# Altium PCB Potencia.PcbDoc
Units mm, origin at the board's own origin, x right, y up, seen from the top; angles counter-clockwise.
Board outline 100 x 100 mm, 2 copper layers (Top Layer, Bottom Layer); 128 components, 68 nets, 367 pads, 168 vias.
Unrouted connection lines stored in the file: 5.
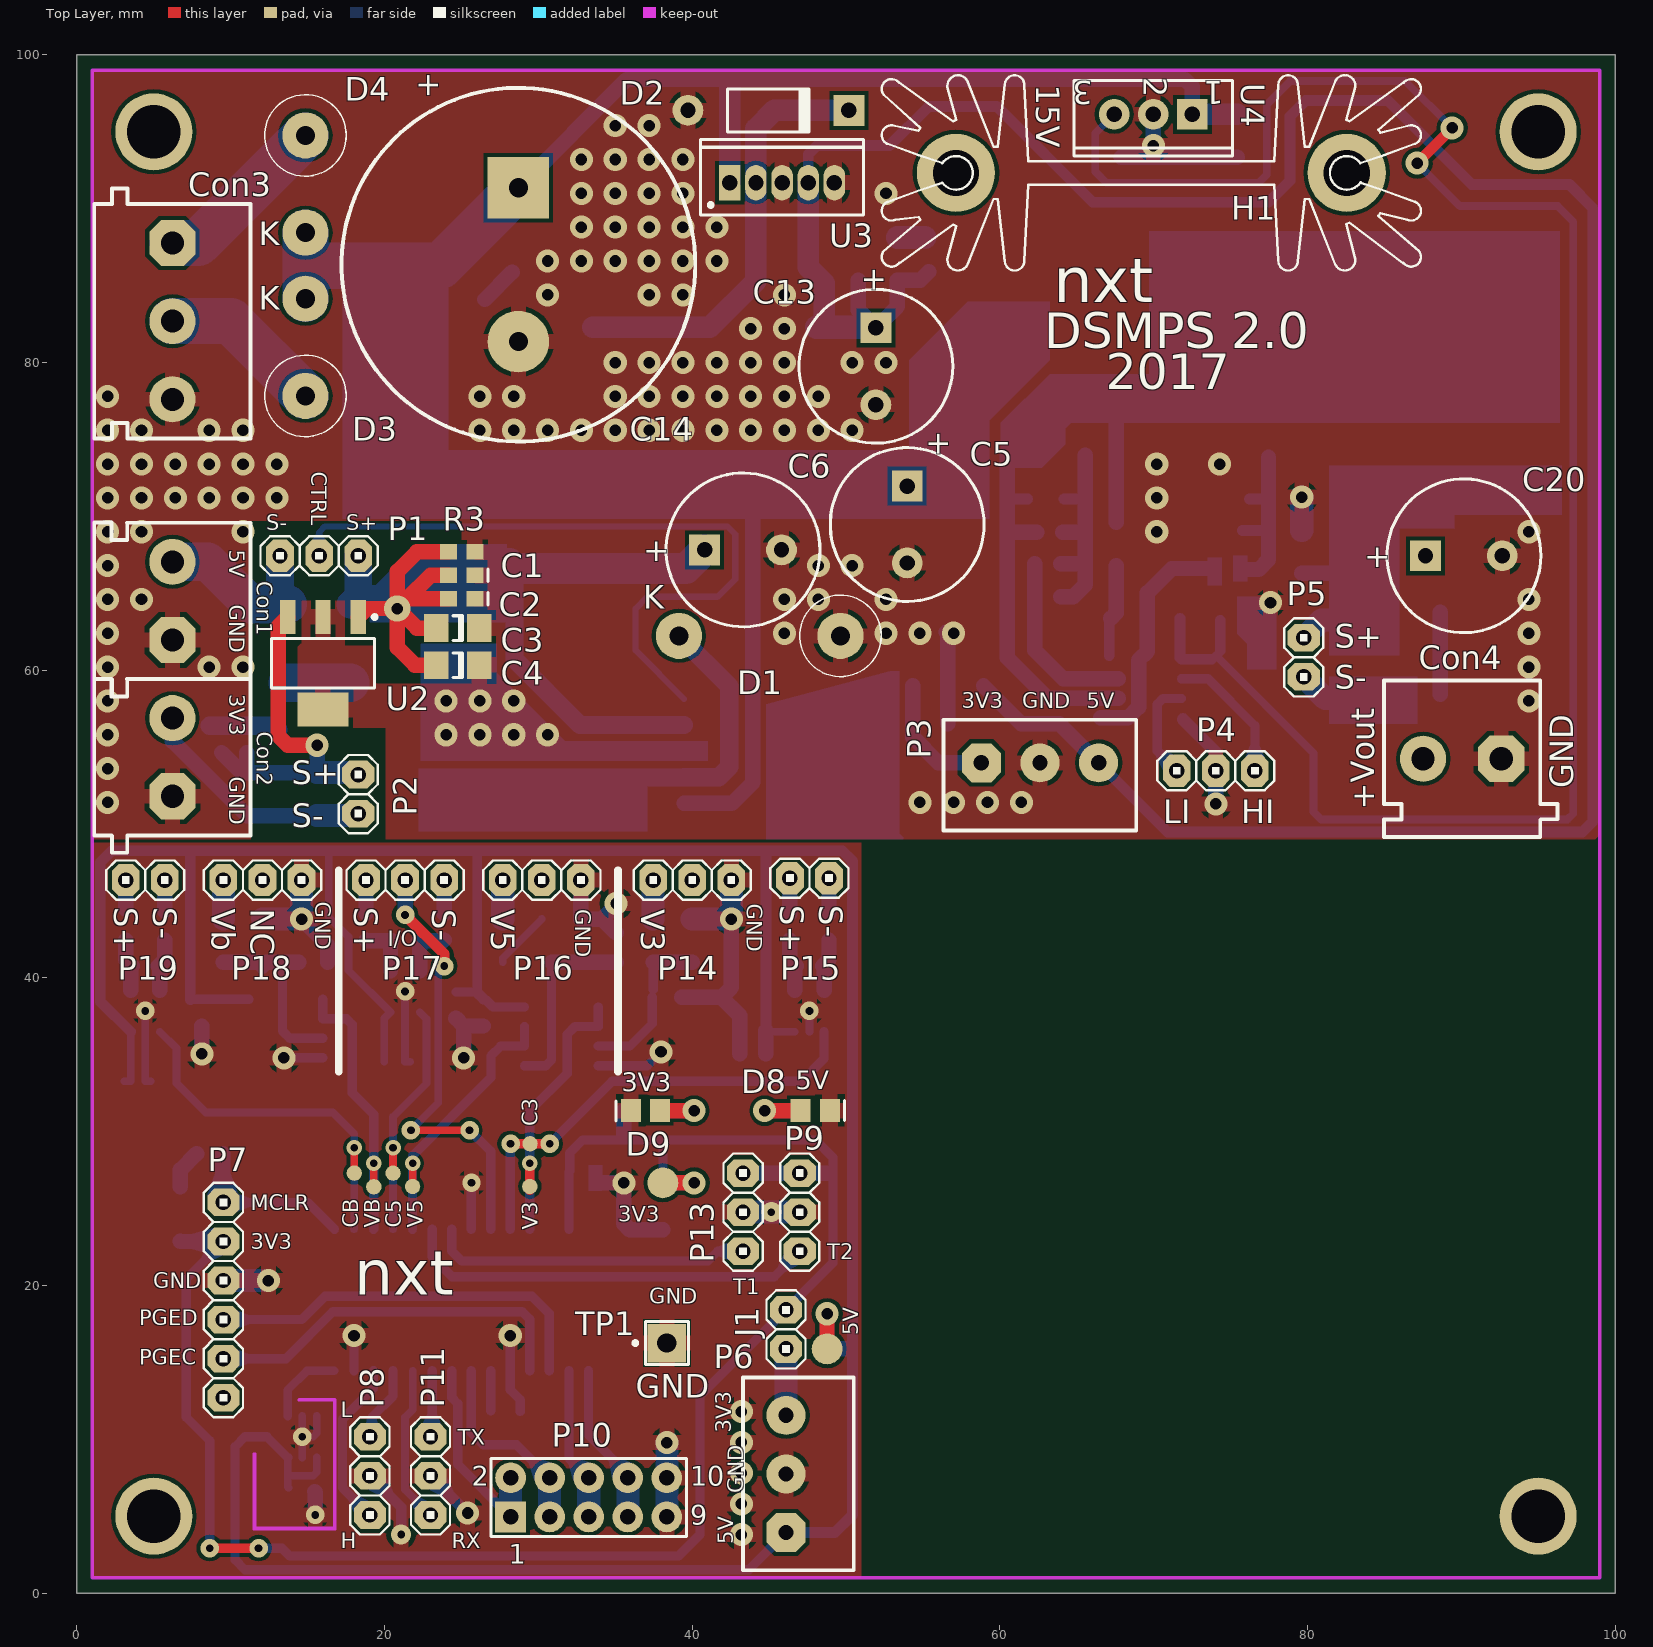
[diagram p0: Top Layer view]
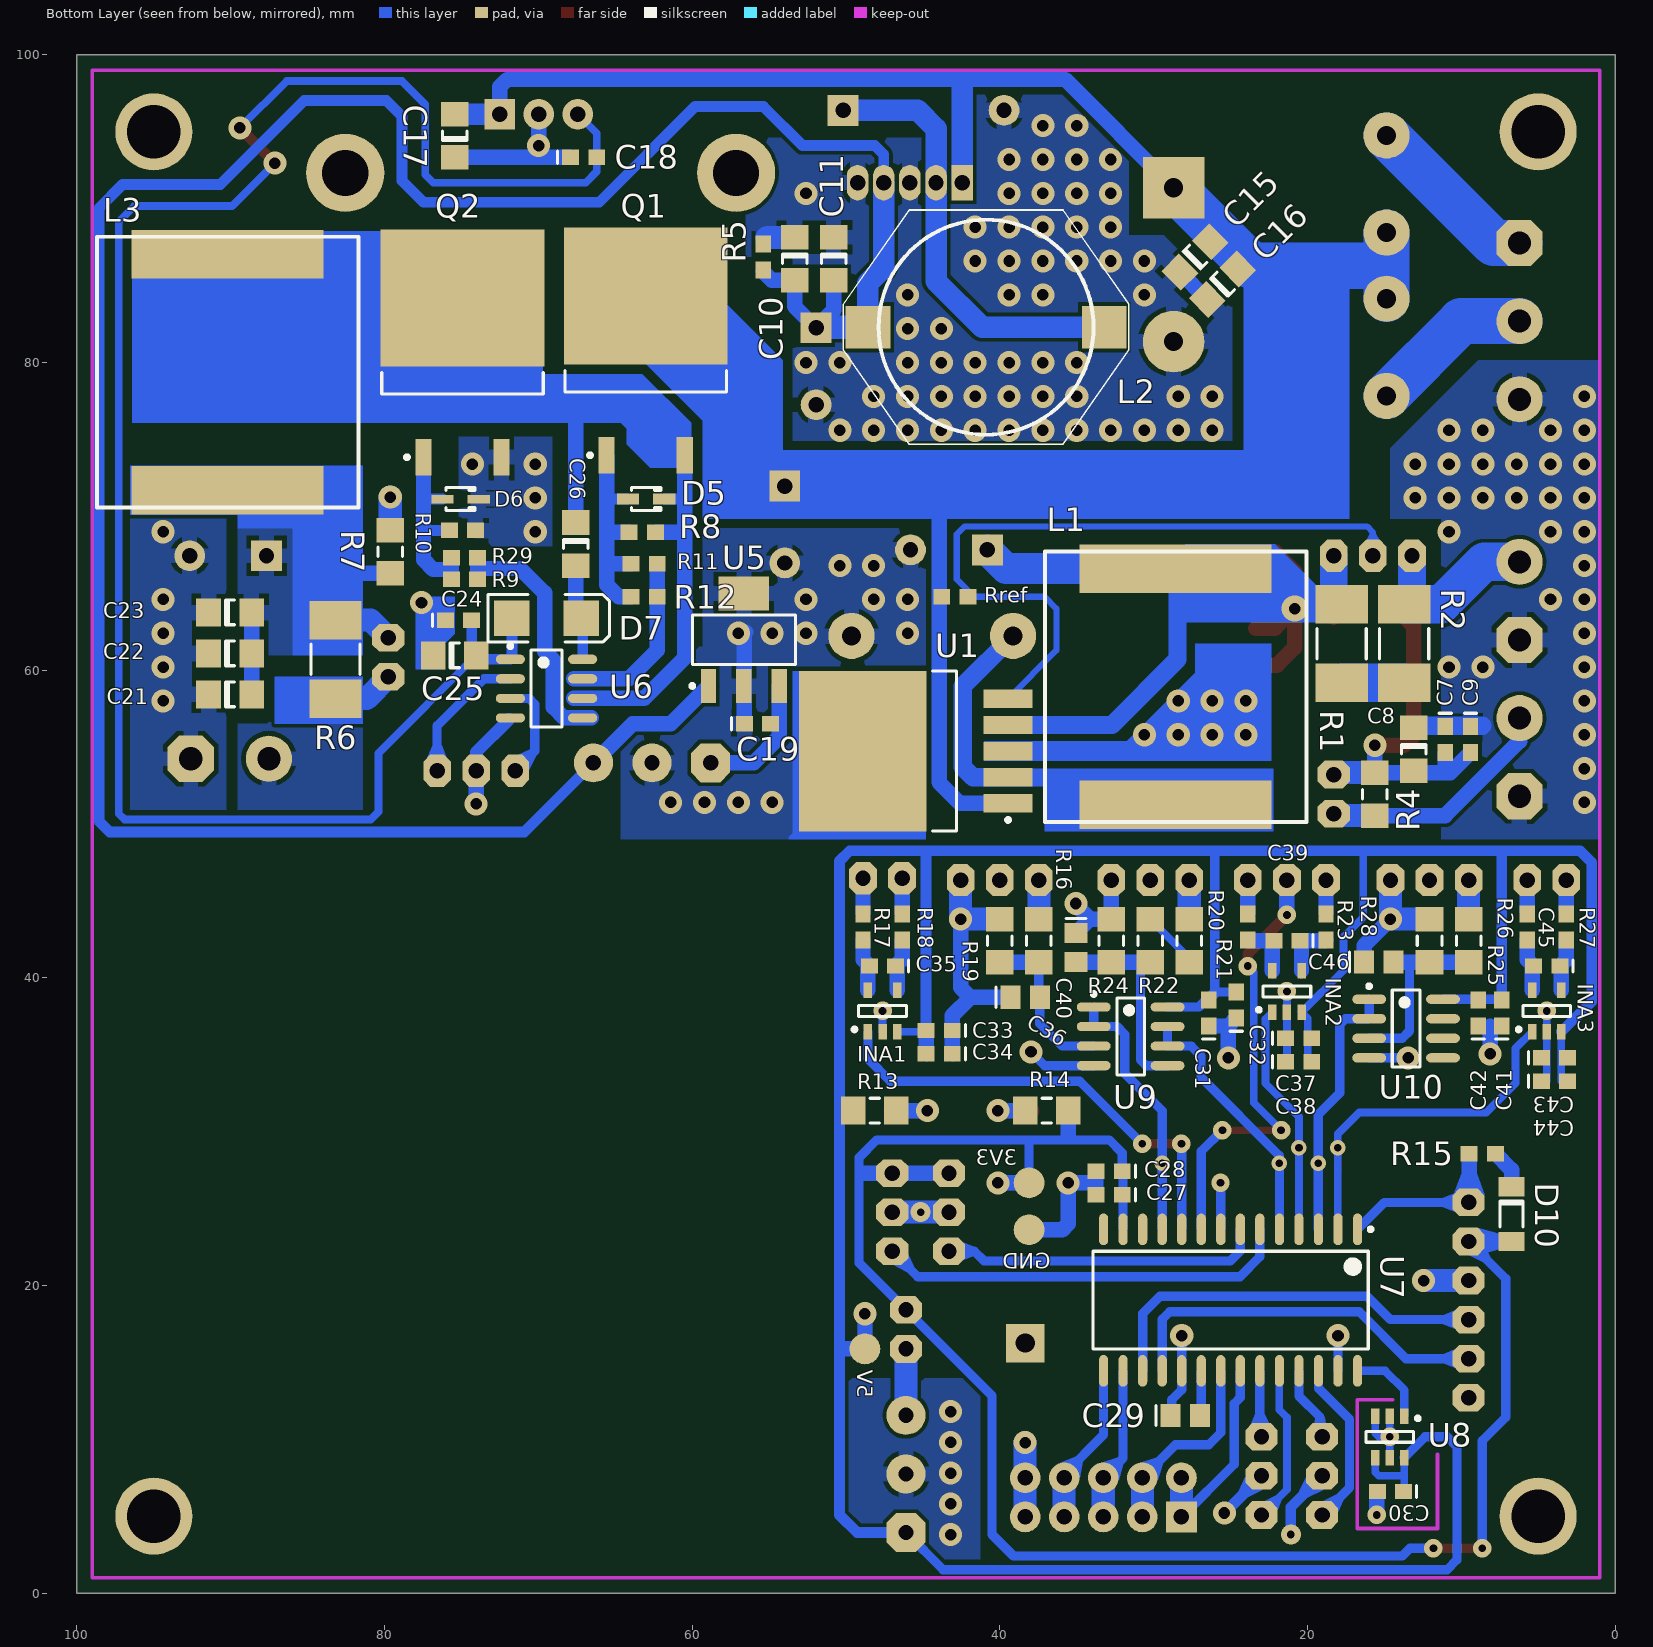
[diagram p1: Bottom Layer view, seen from below]

## Layer stack, top to bottom
Top Solder: solder mask 0.0102, Solder Resist, Dk 3.5
Top Layer: signal copper 0.0356
Dielectric 1: dielectric 0.32, FR-4, Dk 4.8
Bottom Layer: signal copper 0.0356
Bottom Solder: solder mask 0.0102, Solder Resist, Dk 3.5

## Board outline
0,0 100,0 100,100 0,100

## Design rules (kind name [scope] priority, off if disabled: settings)
Clearance "Polygon Clearance" [InPolygon AND (Not(OnLayer('Keep-Out Layer'))) vs All AND (Not(OnLayer('Keep-Out Layer')))] p1: gap=0.25
Clearance [All AND (Not(OnLayer('Keep-Out Layer'))) vs All AND (Not(OnLayer('Keep-Out Layer')))] p2: gap=0.2
ComponentClearance [All] p1 off: gap=0.5 collisioncheckmode=3 verticalgap=0.254 showdistances=TRUE
Height [All] p1: minheight=0 maxheight=80 prefheight=12.7
MinimumSolderMaskSliver SilkscreenOverComponentPads [All] p2: minsoldermaskwidth=0.254
PlaneConnect [All] p1: planeconnectstyle=Relief reliefexpansion=0.508 reliefentries=4 reliefconductorwidth=0.7 reliefairgap=0.6
PolygonConnect [All] p1: connectstyle=Relief reliefconductorwidth=1 reliefentries=4 polygonreliefangle="90 Angle" airgapwidth=0.3
RoomDefinition "Remote Feedback" [InComponentClass('Remote Feedback')] p1 off: confinementstyle=ConfineIn formatcopy=TRUE lockcomponents=FALSE outline 1,30.861 51,30.861 51,48.768 1,48.768
RoomDefinition Control [InComponentClass('Control')] p2 off: confinementstyle=ConfineIn formatcopy=TRUE lockcomponents=FALSE outline 1,1.524 51,1.524 51,30.861 1,30.861
RoomDefinition "Variable Output 1" [InComponentClass('Variable Output 1')] p3: confinementstyle=ConfineIn formatcopy=TRUE lockcomponents=FALSE outline 56.388,49.022 99.441,49.022 99.441,89.408 56.388,89.408
RoomDefinition Regulators [InComponentClass('Regulators')] p4 off: confinementstyle=ConfineIn formatcopy=TRUE lockcomponents=FALSE outline 1,74.549 99,74.549 99,99.06 1,99.06
RoomDefinition "5V and 3V3 Outputs" [InComponentClass('5V and 3V3 Outputs')] p5 off: confinementstyle=ConfineIn formatcopy=TRUE lockcomponents=FALSE outline 1,49 55.372,49 55.372,74.676 1,74.676
RoutingVias [All] p1: holewidth=0.5 width=1.5 viastyle="Through Hole" minholewidth=0.3 minwidth=1 maxholewidth=1.25 maxwidth=3
SolderMaskExpansion [All] p1: expansion=0.102
Width [All] p1: maxlimit=8 minlimit=0.16 preferedwidth=1
27 further rules are at their usual default settings.

## Classes and differential pairs
component class "Remote Feedback": C31 C32 C33 C34 C35 C36 C37 C38 C39 C40 C41 C42 C43 C44 C45 C46 INA1 INA2 INA3 P14 P15 P16 P17 P18 P19 R16 R17 R18 R19 R20 R21 R22 R23 R24 R25 R26 R27 R28 U9 U10
component class Control: C27 C28 C29 C30 D8 D9 D10 J1 P6 P7 P8 P9 P10 P11 P13 R13 R14 R15 TP1 U7 U8
component class "5V and 3V3 Outputs": C1 C2 C3 C4 C5 C6 C7 C8 C9 Con1 Con2 D1 L1 P1 P2 R1 R2 R3 R4 Rref U1 U2
component class Regulators: C10 C11 C13 C14 C15 C16 C17 C18 C19 Con3 D2 D3 D4 H1 L2 P3 R5 U3 U4 U5
component class "Variable Output 1": C20 C21 C22 C23 C24 C25 C26 Con4 D5 D6 D7 L3 P4 P5 Q1 Q2 R6 R7 R8 R9 R10 R11 R12 R29 U6

## Components (designator, comment, footprint, x,y, rotation, side; value= is the part's Value field where it differs from the comment)
C1 "C0603" 0603 25.019,66.167 r180 top
C2 "C0603" 0603 25.019,64.643 r180 top
C3 "SMD" 1206 24.765,62.738 r180 top
C4 "SMD" 1206 24.765,60.325 r180 top
C5 "220uF" CAPPR5-10X16 53.975,69.469 r270 top
C6 "470uF HF" CAPPR5-10X20 43.307,67.818 r0 top
C7 "C0603" 0603 11.049,55.499 r270 bottom
C8 "SMD" 1206 13.081,54.864 r270 bottom
C9 "C0603" 0603 9.398,55.499 r270 bottom
C10 "SMD" 1206 53.34,86.741 r270 bottom
C11 "SMD" 1206 50.8,86.741 r270 bottom
C13 "470uF HF" CAPPR5-10X20 51.943,79.756 r270 top
C14 "Generic Electrolytic Capacitor" "Capacitor 23x48 (DxH)" 28.702,86.36 r90 top
C15 "SMD" 1206 27.305,86.868 r135 bottom
C16 "SMD" 1206 25.527,85.09 r135 bottom
C17 "SMD" 1206 75.438,94.742 r90 bottom
C18 "C0603" 0603 67.056,93.345 r180 bottom
C19 "C0603" 0603 55.753,56.515 r180 bottom
C20 "50V" CAPPR5-10X20 90.17,67.437 r0 top
C21 "SMD" 1206 90.043,58.42 r180 bottom
C22 "SMD" 1206 90.043,61.087 r180 bottom
C23 "SMD" 1206 90.043,63.754 r180 bottom
C24 "C0603" 0603 75.184,63.246 r180 bottom
C25 "SMD" 1206 75.438,60.96 r180 bottom
C26 "SMD" 1206 67.564,68.199 r270 bottom
C27 "C0603" 0603 32.893,25.908 r0 bottom
C28 "C0603" 0603 32.893,27.432 r0 bottom
C29 "6.3V" C0805 27.94,11.557 r180 bottom
C30 "C0603" 0603 14.605,6.604 r0 bottom
C31 "C0603" 0603 26.416,37.719 r90 bottom
C32 "C0603" 0603 24.638,38.227 r90 bottom
C33 "C0603" 0603 43.942,36.576 r0 bottom
C34 "C0603" 0603 43.942,35.052 r0 bottom
C35 "C0603" 0603 47.625,40.767 r0 bottom
C36 "CDR01" C0805 38.354,38.735 r180 bottom
C37 "C0603" 0603 20.574,36.068 r180 bottom
C38 "C0603" 0603 20.574,34.544 r180 bottom
C39 "C0603" 0603 21.336,42.418 r0 bottom
C40 "CDR01" C0805 35.052,41.968 r270 bottom
C41 "C0603" 0603 7.366,37.719 r90 bottom
C42 "C0603" 0603 8.89,37.719 r90 bottom
C43 "C0603" 0603 3.937,34.798 r180 bottom
C44 "C0603" 0603 3.937,33.274 r180 bottom
C45 "C0603" 0603 4.445,40.767 r0 bottom
C46 "CDR01" C0805 15.367,41.021 r180 bottom
Con1 "Salida Buck" My_CN2 1.118,59.436 r90 top
Con2 "Salida Buck" My_CN2 1.118,49.276 r90 top
Con3 "AC Input" My_CN3 11.303,90.297 r270 top
Con4 "Salida Buck" My_CN2 95.123,49.149 r180 top
D1 "1N5822" "Vertical DO-201AD 10.5mm" 46.99,62.23 r180 top
D2 "1N5817" DO-41 44.958,96.393 r0 top
D3 "1N5408" "Vertical DO-201AD" 14.859,80.645 r90 top
D4 "1N5408" "Vertical DO-201AD" 14.859,91.948 r270 top
D5 "15V Zener" SOD323#1 62.992,71.12 r180 bottom
D6 "15V Zener" SOD323#2 75.057,71.12 r180 bottom
D7 "MBRS1100T3G" SMB 69.469,63.373 r180 bottom
D8 "15-21SURC/S530-A3/TR8" 15-21SURC/S530-A3/TR8 48.006,31.369 r0 top
D9 "15-21SURC/S530-A3/TR8" 15-21SURC/S530-A3/TR8 36.957,31.369 r180 top
D10 "1N4148" SOD80C 6.731,24.638 r90 bottom
H1 "Heat sink TO22" My_Heat_sink_TO22 69.85,93.091 r0 top
INA1 "INA196" SOT-23-5 47.625,37.846 r90 bottom
INA2 "INA196" SOT-23-5 21.336,39.116 r90 bottom
INA3 "INA196" SOT-23-5 4.445,37.846 r90 bottom
J1 "Header 2" My_1X02 46.101,18.415 r90 top
L1 "Ferrite Inductor" "SRP1770TA Series" 28.575,58.928 r90 bottom
L2 "SMTDR1206" "SMTDR1206 Inductor" 40.894,82.296 r0 bottom
L3 "Ferrite Inductor" "SRP1770TA Series" 90.202,79.375 r270 bottom
P1 "Header 3" My_1X03 15.748,67.437 r0 top
P2 "Header 2" My_1X02 18.288,53.213 r90 top
P3 "XY2500R-F 3P" OSTOQ033250 62.611,53.975 r0 top
P4 "Header 3" My_1X03 74.041,53.467 r180 top
P5 "Header 2" My_1X02 79.756,62.103 r90 top
P6 "XY2500R-F 3P" OSTOQ033250 46.101,7.747 r90 top
P7 "ICSP" My_1X06 9.525,19.05 r270 top
P8 "Header 3" My_1X03 19.05,7.62 r90 top
P9 "Header 3" My_1X03 46.99,24.765 r270 top
P10 "Interface" HDR2X5 28.194,4.953 r0 top
P11 "Header 3" My_1X03 22.987,7.62 r270 top
P13 "Header 3" My_1X03 43.307,24.765 r270 top
P14 "Header 3" My_1X03 40.005,46.355 r180 top
P15 "Header 2" My_1X02 46.355,46.482 r180 top
P16 "Header 3" My_1X03 30.226,46.355 r180 top
P17 "Header 3" My_1X03 21.336,46.355 r180 top
P18 "Header 3" My_1X03 12.065,46.355 r180 top
P19 "Header 2" My_1X02 3.175,46.355 r180 top
Q1 "SUM110P06" D2PAK_N 63.024,80.772 r90 bottom
Q2 "SUM110P06" D2PAK_N 74.93,80.645 r90 bottom
R1 "ERJL1W" L1W-2512 17.78,61.722 r270 bottom
R2 "ERJL1W" L1W-2512 13.716,61.722 r90 bottom
R3 "2K2" ERA-0603 25.019,67.691 r180 top
R4 "SMD" 8RB-1206 15.621,51.943 r270 bottom
R5 "1K" ERA-0603 55.372,86.868 r270 bottom
R6 "ERJL1W" L1W-2512 83.185,60.706 r270 bottom
R7 "SMD" 8RB-1206 79.629,67.691 r270 bottom
R8 "10K" ERA-0603 63.246,68.961 r180 bottom
R9 "10R" ERA-0603 74.803,65.913 r0 bottom
R10 "10K" ERA-0603 74.93,69.088 r0 bottom
R11 "10" ERA-0603 63.119,66.929 r0 bottom
R12 "10" ERA-0603 63.119,64.77 r0 bottom
R13 "SMD" 8RB-1206 48.133,31.369 r180 bottom
R14 "SMD" 8RB-1206 36.957,31.369 r0 bottom
R15 "10K" ERA-0603 8.636,28.575 r180 bottom
R16 "SMD" 8RB-1206 37.465,42.418 r90 bottom
R17 "10R" ERA-0603 48.895,43.307 r90 bottom
R18 "10R" ERA-0603 46.355,43.307 r90 bottom
R19 "SMD" 8RB-1206 40.005,42.418 r270 bottom
R20 "SMD" 8RB-1206 27.686,42.418 r90 bottom
R21 "10R" ERA-0603 23.876,43.307 r90 bottom
R22 "SMD" 8RB-1206 30.226,42.418 r90 bottom
R23 "10R" ERA-0603 18.796,43.307 r90 bottom
R24 "SMD" 8RB-1206 32.766,42.418 r270 bottom
R25 "SMD" 8RB-1206 9.525,42.418 r90 bottom
R26 "10R" ERA-0603 5.715,43.307 r90 bottom
R27 "10R" ERA-0603 3.175,43.307 r90 bottom
R28 "SMD" 8RB-1206 12.065,42.418 r270 bottom
R29 "10R" ERA-0603 74.803,67.31 r0 bottom
Rref "10K" ERA-0603 42.926,64.77 r0 bottom
TP1 "" PIN1 38.354,16.256 r90 top
U1 "LM2576S-5.0" TS5B_N 45.466,54.737 r0 bottom
U2 "TC1262-3.3VDB" SOT-223-DB3_N 16.002,60.452 r270 top
U3 "LM2575T-5.0" T05A 45.847,91.694 r0 top
U4 "MC7815ACT" 221A-04 69.977,96.139 r180 top
U5 "TC1262-3.3VDB" SOT-223-DB3_N 56.642,61.976 r90 bottom
U6 "IRS21867S" SOIC8 69.469,58.801 r180 bottom
U7 "DSPIC33EP64GS502" MCHP-SOIC-SO28_N 25,19.05 r270 bottom
U8 "MCP1501T" SOT-23-6 14.652,10.16 r270 bottom
U9 "MCP6002-I/SN" SOIC-SN8_N 31.496,36.195 r180 bottom
U10 "MCP6002-I/SN" SOIC-SN8_N 13.589,36.703 r180 bottom

## Footprints (in the part's own frame and the unit in brackets; to place one, negate y for a bottom-side part, rotate by r counter-clockwise, add the part's x,y. Pads: shape width x height; smd on the part's side, far side on the other; paste and mask are expansions set on the pad)
8RB-1206 [mm] "Chip Resistor; Body 3.2 x 1.6 mm (LxW typ)"
  rect 1.6x1.8 smd: 1(-1.4,0) 2(1.4,0)
  silkscreen extent -0.3,-0.8 0.3,0.8
15-21SURC/S530-A3/TR8 [mm] "15-21SURC/S530-A3/TR8 led smd 0805"
  rect 1.3x1.5 smd: 1(-0.95,0) 2(0.95,0)
  silkscreen extent 1.91,-0.64 1.91,0.67
221A-04 [mm] "TO, Thru-Hole, Vertical, Heatsink Mounted; 3 In-Line Leads; Pitch 2.54 mm"
  rect 2x2 hole 1: 1(-2.54,0)
  round 2 hole 1: 2(0,0) 3(2.54,0)
  silkscreen extent -5.15,-2.2 5.15,2.7
0603 [mm] "Chip Capacitor; Body 1.6 x 0.8 mm (LxW typ)"
  rect 1.1x1 smd: 1(-0.85,0) 2(0.85,0)
  silkscreen extent -1.7,-0.4 -1.7,0.4
1206 [mm] "Chip Capacitor; Body 3.2 x 1.6 mm (LxW typ)"
  rect 1.6x1.8 smd: 1(-1.4,0) 2(1.4,0)
  silkscreen extent -0.3,-0.8 0.3,0.8
C0805 [mm] "Chip Capacitor; Body 2.0 x 1.2 mm (LxW typ)"
  rect 1.3x1.5 smd: 1(-0.95,0) 2(0.95,0)
  silkscreen extent -1.9,-0.65 -1.9,0.65
"Capacitor 23x48 (DxH)" [mm] "Electrolytic Capacitor 23x48 (DxH)"
  rect 4x4 hole 1.25: 1(5,0)
  round 4 hole 1.25: 2(-5,0)
  silkscreen extent -11.5,-11.5 11.5,11.5
CAPPR5-10X16 [mm] "Capacitor, Electrolytic, Radial; Body 10 x 16 mm (Dia.xH typ); Pin Spacing 5 mm (typ)"
  rect 2x2 hole 1: 1(-2.5,0)
  round 2 hole 1: 2(2.5,0)
  silkscreen extent -5,-5 5,5
CAPPR5-10X20 [mm] "Capacitor, Electrolytic, Radial; Body 10 x 20 mm (Dia.xH typ); Pin Spacing 5 mm (typ)"
  rect 2x2 hole 1: 1(-2.5,0)
  round 2 hole 1: 2(2.5,0)
  silkscreen extent -5,-5 5,5
D2PAK_N [mm] "D2-PAK, 4-Leads, Body 8.8x10.4mm, Pitch 2.54mm, Lead Span 15.1mm, IPC Medium Density"
  rect 2.4x1.05 smd: 1(-6.8,2.54) 3(-6.8,-2.54)
  rect 8.9x10.65 smd: 2(3.55,0)
  silkscreen extent -6.92,-5.25 -1.3,5.25, body extent -2.7,-5.28 6.3,5.28, height 4.69
DO-41 [mm] "Diode, Axial; Body 5.2 x 2.7 mm (LxDia. max), Lead Dia. 0.86 mm (max)"
  round 2 hole 1: 1(-5.23,0)
  rect 2x2 hole 1: 2(5.23,0)
  silkscreen extent -2.65,-1.4 2.75,1.4
ERA-0603 [mm] "Chip Resistor; Body 1.6 x 0.8 mm (LxW typ)"
  rect 1.1x1 smd: 1(-0.85,0) 2(0.85,0)
HDR2X5 [mm] "Connector; Header; 5x2 Position"
  rect 2x2 hole 1: 1(0,0)
  round 2 hole 1: 2(0,2.54) 3(2.54,0) 4(2.54,2.54) 5(5.08,0) 6(5.08,2.54) 7(7.62,0) 8(7.62,2.54) 9(10.16,0) 10(10.16,2.54)
  silkscreen extent -1.27,-1.27 11.43,3.81
L1W-2512 [mm] "Chip Resistor; Body 6.4 x 3.2 mm (LxW typ)"
  rect 2.5x3.4 smd: 1(-2.55,0) 2(2.55,0)
  silkscreen extent -1,-1.6 1,1.6
MCHP-SOIC-SO28_N [mm] "SOIC, 28-Leads, Body 17.9x7.5mm, Pitch 1.27mm, IPC Medium Density"
  oval 2.05x0.6 smd: 1(-4.6,8.255) 2(-4.6,6.985) 3(-4.6,5.715) 4(-4.6,4.445) 5(-4.6,3.175) 6(-4.6,1.905) 7(-4.6,0.635) 8(-4.6,-0.635) 9(-4.6,-1.905) 10(-4.6,-3.175) 11(-4.6,-4.445) 12(-4.6,-5.715) 13(-4.6,-6.985) 14(-4.6,-8.255) 15(4.6,-8.255) 16(4.6,-6.985) 17(4.6,-5.715) 18(4.6,-4.445) 19(4.6,-3.175) 20(4.6,-1.905) 21(4.6,-0.635) 22(4.6,0.635) 23(4.6,1.905) 24(4.6,3.175) 25(4.6,4.445) 26(4.6,5.715) 27(4.6,6.985) 28(4.6,8.255)
  silkscreen extent -4.72,-8.95 3.18,9.23, body extent -3.75,-8.95 3.75,8.95, height 2.65
My_1X02 [mm]
  oct 1.8x2.1 hole 1: 1(-2.54,0) 2(0,0)
  silkscreen extent -3.81,-1.27 1.27,1.27
My_1X03 [mm]
  oct 1.8x2.1 hole 1: 1(-2.54,0) 2(0,0) 3(2.54,0)
  silkscreen extent -3.81,-1.27 3.81,1.27
My_1X06 [mm]
  oct 1.8x2.1 hole 1: 1(-6.35,0) 2(-3.81,0) 3(-1.27,0) 4(1.27,0) 5(3.81,0) 6(6.35,0)
  silkscreen extent -7.62,-1.27 7.62,1.27
My_CN2 [mm]
  oct 3x3 hole 1.5: 1(2.527,-5.093)
  round 3 hole 1.5: 2(7.607,-5.093)
  silkscreen extent -1.14,-10.17 10.16,-0.01
My_CN3 [mm]
  oct 3x3 hole 1.5: 1(2.527,-5.093)
  round 3 hole 1.5: 2(7.607,-5.093) 3(12.687,-5.093)
  silkscreen extent -1.02,-10.17 15.23,-0.01
My_Heat_sink_TO22 [mm]
  round 5.08 hole 3: A2,5(-12.7,-0.762) B2,5(12.7,-0.762)
  silkscreen extent -17.53,-7.11 17.53,5.59
OSTOQ033250 [mm] "TERM BLOCK HDR 3POS VERT 3.81MM"
  oct 2.54x2.54 hole 1: 1(-3.81,0)
  round 2.54 hole 1: 2(0,0) 3(3.81,0)
  silkscreen extent -6.26,-4.4 6.26,2.8
PIN1 [mm] "Connector; Plug"
  rect 2.5x2.5 hole 1.25: 1(0,0)
  silkscreen extent -1.4,-1.4 1.4,2.17
SMB [mm] "DO-214-AA/SMB; 2 C-Bend Leads; Body 5.3 x 3.6 mm, inc. leads (LxW)"
  rect 2.3x2.3 smd: 1(-2.25,0) 2(2.25,0)
  silkscreen extent -3.8,-1.55 4.1,1.55
"SMTDR1206 Inductor" [mm] "SMTDR1206 Inductor"
  rect 2.92x2.79 smd: 1(-7.685,0) 2(7.685,0)
  silkscreen extent -9.27,-7.62 9.27,7.62
SOD80C [mm] "Metal Electrode Face (MELF) Diode; Body 3.5 x 1.6 mm (LxDia)"
  rect 1.25x1.7 smd: 1(-1.775,0) 2(1.775,0)
  silkscreen extent -0.85,-0.75 0.85,0.75
SOD323#1 [mm] "SOD-323/SC-76; 2 Leads; Body 1.7 x 1.3 mm, (LxW)"
  rect 1.45x0.7 smd: 1(1.175,0) 2(-1.175,0)
  silkscreen extent -0.95,-0.75 0.95,0.75
SOD323#2 [mm] "SOD-323/SC-76; 2 Leads; Body 1.7 x 1.3 mm, (LxW)"
  rect 1.45x0.55 smd: 1(1.175,0) 2(-1.175,0)
  silkscreen extent -0.95,-0.75 0.95,0.75
SOIC8 [mm] "SOIC, 8-Leads, Body 4.9x3.9mm, Pitch 1.27mm, IPC High Density"
  oval 1.9x0.6 smd: 1(-2.35,1.905) 2(-2.35,0.635) 3(-2.35,-0.635) 4(-2.35,-1.905) 5(2.35,-1.905) 6(2.35,-0.635) 7(2.35,0.635) 8(2.35,1.905)
  silkscreen extent -2.48,-2.5 1,2.88, body extent -2,-2.5 2,2.5, height 1.75
SOIC-SN8_N [mm] "SOIC, 8-Leads, Body 4.9x3.8mm, Pitch 1.27mm, IPC Medium Density"
  oval 2.2x0.6 smd: 1(-2.4,1.905) 2(-2.4,0.635) 3(-2.4,-0.635) 4(-2.4,-1.905) 5(2.4,-1.905) 6(2.4,-0.635) 7(2.4,0.635) 8(2.4,1.905)
  silkscreen extent -2.53,-2.5 0.9,2.88, body extent -2,-2.5 2,2.5, height 1.75
SOT-23-5 [mm] "SOT23, 5-Leads, Body 2.9x1.7mm, Pitch 0.95mm, Lead Span 2.8mm, IPC High Density"
  rect 1x0.55 smd: 1(-1.35,0.95) 2(-1.35,0) 3(-1.35,-0.95) 4(1.35,-0.95) 5(1.35,0.95)
  silkscreen extent -1.32,-1.55 0.35,1.95, body extent -0.9,-1.55 0.9,1.55, height 1.45
SOT-23-6 [mm] "SOT23, 6-Leads, Body 2.9x1.7mm, Pitch 0.95mm, Lead Span 2.8mm, IPC High Density"
  rect 1x0.55 smd: 1(-1.35,0.95) 2(-1.35,0) 3(-1.35,-0.95) 4(1.35,-0.95) 5(1.35,0) 6(1.35,0.95)
  silkscreen extent -1.32,-1.55 0.35,1.95, body extent -0.9,-1.55 0.9,1.55, height 1.45
SOT-223-DB3_N [mm] "SOT223, 4-Leads, Body 6.5x3.5mm, Pitch 2.3mm, Lead Span 7mm, IPC Medium Density"
  rect 2.2x1 smd: 1(-3,2.3) 2(-3,0) 3(-3,-2.3)
  rect 2.2x3.3 smd: 4(3,0)
  silkscreen extent -3.12,-3.35 1.6,3.48, body extent -1.85,-3.35 1.85,3.35, height 1.8
"SRP1770TA Series" [mm] "Shielded Wirewound Inductor"
  rect 3.15x12.5 smd: 1(-7.675,0) 2(7.675,0)
  silkscreen extent -8.8,-8.5 8.8,8.5
T05A [mm] "TO, Thru-Hole, Vertical, Heatsink Mounted; 5 In-Line Leads; Pitch 1.70 mm"
  rect 1.4x2.3 hole 1: 1(-3.4,0)
  oval 1.4x2.3 hole 1: 2(-1.7,0) 3(0,0) 4(1.7,0) 5(3.4,0)
  silkscreen extent -5.3,-2.1 5.3,2.8, body extent -5.35,-2.15 5.35,2.85, height 19.6
TS5B_N [mm] "D2-PAK, 6-Leads, Body 8.6x10.2mm, Pitch 1.7mm, Lead Span 14.1mm, IPC Medium Density"
  rect 3.2x1.2 smd: 1(-6,3.4) 2(-6,1.7) 3(-6,0) 4(-6,-1.7) 5(-6,-3.4)
  rect 8.3x10.45 smd: 6(3.45,0)
  silkscreen extent -6.12,-5.2 -1.1,5.2, body extent -2.65,-5.2 6.24,5.2, height 4.65
"Vertical DO-201AD" [mm] "Vertical DO-201AD"
  round 3 hole 1.25: 1(-2.816,0) 2(3.5,0)
  silkscreen extent -5.47,-2.65 -0.17,2.65
"Vertical DO-201AD 10.5mm" [mm] "Vertical DO-201AD 10.5mm between pins"
  round 3 hole 1.25: 1(-2.65,0) 2(7.85,0)
  silkscreen extent -5.3,-2.65 0,2.65

## Part data
C1 C2 C7 C9 C18 C19 C24 C27 C28 C30 C31 C32 C33 C34 C35 C37 C38 C39 C41 C42 C43 C44 C45: "C1608X7R1C105K X7R"
C3 C4 C8 C10 C11 C15 C16 C17 C21 C22 C23 C25 C26: library part C1206, "Ceramic Chip Capacitor - Standard"
C5: library part EKA00DD322J00, "Aluminum Electrolytic Capacitor, Radial Style with Long Leads: 220uF, 63V"
C6 C13: library part EKC00DE347E00, "Aluminum Electrolytic Capacitor, Radial Style with Long Leads: 470uF, 25V"
C20: library part EKB00DE347H00, "Aluminum Electrolytic Capacitor, Radial Style with Long Leads: 470uF, 50V"
C29: library part CDR01, "Ceramic Chip Capacitor - MIL-PRF-55681"
C36 C40 C46: "Ceramic Chip Capacitor - MIL-PRF-55681"
Con1 Con2 Con4: library part "CON2 pin blue", "Connector blue screw"
Con3: library part "CON3 pin Green", "Connector green screw"
D1 D7: library part "Generic Schottky Diode", "Generic Schottky Diode"
D2: library part 1N6095, "Schottky Rectifier"
D3 D4: library part "Diode 1N5408", "3 Amp Medium Power Silicon Rectifier Diode"
D5 D6: library part "D Zener", "Zener Diode"
D8 D9: library part "15-21SURC/S530-A3/TR8 led smd 0805 red", "15-21SURC/S530-A3/TR8 led smd 0805 red"
D10: "High Conductance Fast Diode"
H1: "Heat sink for TO22"
INA1 INA2 INA3: "Current Shunt Monitor -16 V to +80 V Common-Mode Range"
J1 P2 P5 P15 P19: "Header, 2-Pin"
L2: library part "Ferrite Inductor", "Ferrite Inductor"
P1 P4 P8 P9 P11 P13 P14 P16 P17 P18: "Header, 3-Pin"
P3 P6: "HEADER 3P P/CI 90gra VERDE P=3.81MM XY2500R-F"
P7: library part "Header 6", "Header, 6-Pin"
P10: library part "Header 5X2", "Header, 5-Pin, Dual row"
Q1 Q2: library part IRF540NS, "HEXFET Power MOSFET"
R1 R2 R6: "Low Ohmic Value Thick Film Chip Resistor, 40m Ohm to 100m Ohm Range, 1% and 5% Tolerance, 2512 Size, 1 W"
R3 R5 R8 R9 R10 R11 R12 R15 R17 R18 R21 R23 R26 R27 R29 Rref: library part ERA3Y, "Rectangular Thick Film Chip Resistor, 10 Ohm to 330k Ohm Range, 0.1% and 0.5% Tolerance, 0603 Size, 0.063 W"
R4 R7 R13 R14 R16 R19 R20 R22 R24 R25 R28: library part ERJ8BQ, "Low Ohmic Value Thick Film Chip Resistor, 0.22 Ohm to 9.1 Ohm Range, 1%, 2% and 5% Tolerance, 1206 Size, 0.33 W"
TP1: library part Plug, "Plug"
U1: "SIMPLE SWITCHER® 3A Step-Down Voltage Regulator, 5-pin TO-263"
U2 U5: "500mA Fixed Output CMOS LDO, 3-Pin SOT-223, Extended Temperature"
U3: "SIMPLE SWITCHER® 1A Step-Down Voltage Regulator, 5-pin TO-220"
U4: "3-Terminal Positive Fixed Voltage Regulator"
U6: "Half-Bridge Gate Driver IC Inverting 8-SOIC"
U7: "dsPIC dsPIC™ 33EP Microcontroller IC 16-Bit 70 MIPs 64KB (64K x 8) FLASH 28-SOIC"
U8: "Series Voltage Reference IC ±0.08% 20mA SOT-23-6"
U9 U10: "1 MHz, Low-Power Operational Amplifier, 8-Pin SOIC, Industrial Temperature"

## Free pads (board coordinates)
  round 5 hole 3.5: 0(5,5) 0(5,5) 0(5,95) 0(95,5) 0(95,95)
  round 1 smd: 0(18.034,27.305) 0(19.304,26.416) 0(20.555,27.305) 0(21.825,26.435) 0(29.445,26.435) 0(29.464,29.21)
  round 2 smd far side: 0(38.1,23.622) 0(38.1,26.67) 0(48.768,15.875)
  round 2 smd: 0(38.1,26.67) 0(48.768,15.875)

## Via types
v1: diameter 1.5, hole 0.75, Top Layer to Bottom Layer, 146 vias
v2: diameter 1.2, hole 0.5, Top Layer to Bottom Layer, 14 vias
v3: diameter 1, hole 0.5, Top Layer to Bottom Layer, 5 vias
v4: diameter 1.3, hole 0.5, Top Layer to Bottom Layer, 2 vias
v5: diameter 1.7, hole 0.75, Top Layer to Bottom Layer, 1 vias

## Nets (pads, with @x,y where several pads share a name; then routed paths per layer and width w, separated by ;. In a path a pad name is that pad's centre, name@x,y a point inside that pad or via, vN(x,y) a via of type N, cw(c..) or ccw(c..) an arc to the next point about the centre after c; other vN are vias at no path point)
3V3_SENSE_NEG: Con2.2 P2.1 R4.2 | length 15.6
  Bottom Layer w1: Con2.2 6.21,55.385 11.052,50.543 R4.2
  Bottom Layer w1.5: R4.2 18.158,50.543 P2.1
3V3_SENSE_POS: C7.2 C8.2 C9.2 P2.2 R4.1 U2.3 | length 23.5
  Top Layer w1: U2.3 13.081,62.831 13.081,55.753 13.716,55.118 v1(15.621,55.118)
  Bottom Layer w1: C9.2 10.704,53.343 ; C7.2 11.049,53.688 10.704,53.343 ; v1(15.621,55.118) R4.1 10.704,53.343
  Bottom Layer w1.5: R4.1 18.158,53.343 P2.2
3V3FEEDBACK: pad.0@29.445,26.435 U7.11 U9.1 U9.2 | length 18.9
  Top Layer w0.6: pad.0@29.445,26.181 v3(29.445,27.94)
  Bottom Layer w0.6: U7.11 v3(29.445,27.94) 29.445,31.35 31.877,33.782 31.877,36.322 32.385,36.83 U9.2 U9.1
5V_CTRL: P1.2 Rref.1 U1.5 | length 46.3
  Bottom Layer w0.4: P1.2 15.748,68.961 16.129,69.342 42.291,69.342 42.799,68.834 42.799,65.913 41.656,64.77 37.084,64.77 36.322,64.008 36.322,61.281 U1.5
5V_SENSE_NEG: Con1.2 P1.1 R2.2 | length 12
  Bottom Layer w1.8: P1.1 13.208,64.78 R2.2
  Bottom Layer w2.5: Con1.2 8.522,67.043 11.293,64.272 R2.2
5V_SENSE_POS: C1.2 C2.2 C3.2 C4.2 C6.1 L1.2 P1.3 R1.1 R3.2 U1.4 U2.1 | length 60.1
  Top Layer w1: U2.1 18.858,64.008 v5(20.828,64.008) ; C4.2 21.971,60.325 20.828,61.468 v5(20.828,64.008) ; C3.2 22.098,62.738 v5(20.828,64.008) ; C2.2 21.463,64.643 ; C1.2 22.987,66.167 21.463,64.643 ; R3.2 22.098,67.691 20.828,66.421 v5(20.828,64.008) ; v5(20.828,64.008) 21.463,64.643
  Bottom Layer w1.2: L1.2 28.448,66.476 28.448,60.706 32.717,56.437 U1.4
  Bottom Layer w1.8: R1.1 18.288,64.78 P1.3 ; L1.2@28.122,67.056 L1.2
  Bottom Layer w2: L1.2 39.592,66.603 C6.1
5VFEEDBACK: pad.0@21.825,26.435 U7.5 U9.6 U9.7 | length 18.6
  Top Layer w0.5: pad.0@21.825,26.435 v3(21.825,27.94)
  Bottom Layer w0.6: U7.5 v3(21.825,27.94) 21.825,28.429 26.924,33.528 26.924,34.925 27.559,35.56 U9.6 U9.7
+3V3: C19.2 C27.1 C28.1 D10.1 J1.2 P3.1 P7.2 P9.1 P13.1 pad.0@38.1,26.67 R14.1 U5.3 U7.13 | length 130.5
  Top Layer w0.6: v2(8.636,2.921) v2(11.811,2.921)
  Top Layer w1: pad.0@38.1,26.67 v1(40.132,26.67)
  Bottom Layer w0.6: v2(8.636,2.921) 8.636,9.906 7.112,11.43 7.112,20.447 P7.2 ; v2(11.811,2.921) 13.335,2.921 13.843,2.413 39.116,2.413 40.513,3.81 40.513,12.827 J1.2 49.149,21.463 49.149,28.321 48.006,29.464 38.1,29.464 ; U7.13 31.985,27.374 C28.1 32.043,28.614 32.893,29.464 38.1,29.464 ; pad.0@38.1,26.67 38.1,29.464
  Bottom Layer w1: D10.1 6.734,22.86 P7.2 ; 35.557,29.718 R14.1 ; pad.0@38.1,26.67 v1(40.132,26.67) ; P13.1 P9.1 48.768,27.305 ; U5.3 54.342,55.64 56.007,53.975 P3.1
+5V: C10.2 C11.2 C13.1 C30.1 C31.2 C32.2 C33.2 C34.2 C37.2 C38.2 C41.2 C42.2 C43.2 C44.2 INA1.3 INA2.3 INA3.3 L2.2 P3.3 P6.1 pad.0@48.768,15.875 R5.2 R13.1 U3.4 U5.1 U8.4 U8.6 U9.8 U10.8 | length 401.5
  Top Layer w1: pad.0@48.768,15.875 v1(48.768,18.161)
  Bottom Layer w0.5: C44.2 3.495,33.274 INA3.3 ; U8.6 13.702,7.62 ; C30.1@13.755,6.858 13.702,6.911 13.702,7.62 ; U8.4 15.602,7.855 15.367,7.62 13.702,7.62 ; 16.383,48.26 16.383,43.942 17.653,42.672 17.653,40.499 INA2.3 19.978,37.358 C38.2@19.978,34.544 ; C33.2 44.872,36.496 INA1.3
  Bottom Layer w0.6: C41.2 7.405,38.608 U10.8 ; U8.6 12.352,10.16 10.922,10.16 10.287,9.525 10.287,2.159 10.922,1.524 43.688,1.524 P6.1 ; C32.2 25.908,39.077 C31.2 ; 26.035,48.006 26.035,39.116 27.051,38.1 U9.8
  Bottom Layer w0.7: INA3.3 1.524,38.467 1.524,47.498 2.286,48.26 8.636,48.26 16.383,48.26 49.761,48.26 50.419,47.602 50.419,5.08 49.276,3.937 P6.1 ; C41.2 7.366,48.006 ; C33.2 44.792,48.133 ; U3.4 47.547,93.521 48.133,94.107 52.832,94.107 55.372,96.647 59.817,96.647 66.04,90.424 77.47,90.424 78.867,91.821 78.867,96.012 79.883,97.028 85.217,97.028 90.678,91.567 97.028,91.567 98.55,90.045 98.55,50.163 97.864,49.477 70.919,49.477 P3.3
  Bottom Layer w1: C34.2 C33.2 ; v1(48.768,18.161) 48.768,15.875 50.038,15.875 ; C11.2 50.8,83.399 51.903,82.296 C13.1 53.34,83.653 C10.2 54.822,85.341 R5.2@55.372,85.891 ; U5.1 61.403,56.515 63.881,56.515 P3.3
  Bottom Layer w1.4: U3.4 47.547,86.184 48.579,85.152 L2.2
  Bottom Layer w1.5: L2.2@48.071,82.296 L2.2 C13.1@51.903,82.296
+15V: C18.2 C24.2 C25.2 D7.1 U4.3 U6.1 | length 124.7
  Top Layer w0.7: v1@87.185,93.027 v1(89.408,95.25)
  Bottom Layer w0.5: U4.3 66.206,94.908 C18.2 66.206,92.417 66.929,91.694 76.835,91.694 77.343,92.202 77.343,96.774 78.867,98.298 86.36,98.298 v1(89.408,95.25) ; C25.2@73.784,60.706 C25.2 80.391,54.607 80.391,50.8 80.899,50.292 96.901,50.292 97.282,50.673 97.282,89.154 96.266,90.17 89.916,90.17 v1(87.122,92.964)
  Bottom Layer w0.7: U6.1@71.719,60.806 D7.1 ; U6.1 C25.2@73.784,60.706 ; C25.2@74.334,61.256 C24.2
+30V: C5.1 C14.1 C15.2 C16.2 C17.2 D3.2 D4.2 Q1.2 Rref.2 U1.1 U3.1 U4.1 | length 101
  Bottom Layer w1: C14.1 35.742,98.4 72.034,98.4 72.517,97.917 U4.1 ; U1.1 42.574,51.337 43.942,52.705 43.942,70.485
  Bottom Layer w1.4: U3.1 42.447,98.044 ; U4.1@72.52,96.142 C17.2
  Bottom Layer w3: D3.2 14.859,86.296 ; D4.2 14.859,86.296 ; C14.1 23.638,86.296 14.859,86.296
_3V3_SENSE_NEG: P15.1 R17.2 | length 2.3
  Bottom Layer w1: R17.2 P15.1
_3V3_SENSE_POS: P15.2 R18.2 | length 2.3
  Bottom Layer w1: R18.2 P15.2
_5V_CTRL: P17.2 U7.9 | length 28.9
  Top Layer w0.5: v2(21.717,30.099) v2(25.527,30.099)
  Top Layer w0.7: v2(21.336,44.088) 23.876,41.548 v2(23.876,40.767)
  Bottom Layer w0.5: v2(21.717,30.099) 23.495,31.877 23.495,40.386 v2(23.876,40.767)
  Bottom Layer w0.6: v2(25.527,30.099) 26.905,28.721 U7.9
  Bottom Layer w1: v2@21.336,44.196 P17.2
_+3V3_OUT: P14.3 R16.2 | length 2.5
  Bottom Layer w1.5: R16.2 P14.3
_+5V_OUT: P16.3 R20.2 | length 2.5
  Bottom Layer w1.5: R20.2 P16.3
__5V_SENSE_NEG: P17.1 R21.2 | length 2.2
  Bottom Layer w1: R21.2 P17.1
__5V_SENSE_POS: P17.3 R23.2 | length 2.2
  Bottom Layer w1: R23.2 P17.3
_OUT1_SENSE_NEG: P19.1 R26.2 | length 2
  Bottom Layer w1: R26.2@5.715,44.323 P19.1
_OUT1_SENSE_POS: P19.2 R27.2 | length 1.9
  Bottom Layer w1: R27.2@3.175,44.45 P19.2
_OUT_BUCK_1: P18.3 R25.2 | length 2.5
  Bottom Layer w1.5: R25.2 P18.3
BUCK1FEEDBACK: pad.0@19.304,26.416 U7.3 U10.1 U10.2 | length 18.8
  Top Layer w0.5: pad.0@19.304,26.416 v3(19.304,27.94)
  Bottom Layer w0.6: U10.1 U10.2 17.526,37.338 17.907,36.957 17.907,32.512 19.304,31.115 v3(19.304,27.94) 19.304,23.669 U7.3
CURRENT3V3: INA1.1 pad.0@29.464,29.21 U7.10 | length 30.1
  Top Layer w0.6: v2(28.194,29.21) v2(30.734,29.21)
  Bottom Layer w0.6: U7.10 28.175,29.191 v2(28.194,29.21) ; v2@30.734,29.083 v2(30.734,29.21) 34.798,33.274 47.117,33.274 48.575,34.732 INA1.1
CURRENT5V: INA2.1 pad.0@20.555,27.305 U7.4 | length 16.9
  Top Layer w0.5: pad.0@20.555,27.305 v3(20.555,28.956)
  Bottom Layer w0.5: U7.4 v3(20.555,28.956) 20.555,30.969 22.733,33.147 22.733,37.319 INA2.1
CURRENTBUCK1: INA3.1 pad.0@18.034,27.305 U7.2 | length 24.6
  Top Layer w0.5: pad.0@18.034,27.305 v3(18.034,28.956)
  Bottom Layer w0.5: INA3.1 6.477,35.414 6.477,33.147 8.382,31.242 16.637,31.242 18.034,29.845 v3(18.034,28.956) 18.034,23.669 U7.2
FAULT: P10.5 P10.6 U7.16 | length 10
  Bottom Layer w0.6: U7.16 31.985,8.782 P10.6
  Bottom Layer w1.5: P10.5 P10.6
GATE1_BUCK1_PIC: P4.1 P8.1 U6.2 U7.26 | length 19.9
  Bottom Layer w0.6: P8.1 17.272,6.858 17.272,11.303 19.285,13.316 U7.26 ; U6.2 73.533,59.436 76.581,56.388 P4.1
GATE2_BUCK1_PIC: P4.3 P8.3 U6.3 U7.25 | length 11.5
  Bottom Layer w0.6: P8.3@19.177,10.16 19.177,11.43 20.555,12.808 U7.25 ; P4.3 70.231,54.737 70.231,57.785 70.612,58.166 U6.3
GND: C1.1 C2.1 C3.1 C4.1 C5.2 C6.2 C7.1 C8.1 C9.1 C10.1 C11.1 C13.2 C14.2 C15.1 C16.1 C17.1 C18.1 C19.1 C20.2 C21.1 C22.1 C23.1 C24.1 C25.1 C27.2 C28.2 C29.1 C30.2 C31.1 C32.1 C33.1 C34.1 C36.1 C37.1 C38.1 C40.1 C41.1 C42.1 C43.1 C44.1 C46.1 Con1.1 Con2.1 Con3.3 Con4.1 D1.1 D2.1 D6.1 D8.2 D9.2 INA1.2 INA2.2 INA3.2 P3.2 P4.2 P6.2 P7.3 P8.2 P9.2 P10.9 P10.10 P11.2 P13.2 P14.1 P16.1 P18.1 pad.0@38.1,23.622 Q2.3 R3.1 R5.1 R7.1 R10.1 R19.1 R24.1 R28.1 TP1.1 U1.3 U1.6 U2.2 U2.4 U3.3 U3.5 U4.2 U5.2 U5.4 U6.4 U7.8 U7.19 U7.27 U8.2 U8.3 U8.5 U9.4 U10.4 | length 133.9
  Bottom Layer w0.5: v2(4.445,37.846) INA3.2 4.445,33.274 C44.1 ; U8.5 v2(14.652,10.16) ; U8.2 v2(14.652,10.16) ; U8.3 15.602,10.395 15.367,10.16 v2(14.652,10.16) ; v2(21.336,39.116) INA2.2 21.336,34.544 C38.1@21.678,34.544 ; INA1.2 v2(47.625,37.846)
  Bottom Layer w0.6: v1(13.462,34.798) U10.4 ; U7.27 v1(18.015,16.745) ; U7.8 v2@25.635,26.778 ; v1(28.175,16.745) U7.19 28.175,13.227 28.829,12.573 C29.1@28.829,11.811 ; U9.4 37.084,34.29 v1(37.973,35.179)
  Bottom Layer w0.7: P8.2 21.082,5.588 v4(21.082,3.81) ; P11.2 v1(25.4,5.207)
  Bottom Layer w0.8: U6.4@71.914,56.801 74.041,54.674 P4.2
  Bottom Layer w1: v1(8.128,35.052) 8.128,36.869 ; v1(14.605,43.815) 16.317,42.103 C46.1 ; C30.2 15.494,6.565 v2(15.494,5.08) ; C32.1 25.146,36.869 ; v1(25.146,34.798) 25.146,36.869 ; C31.1 25.146,36.869 ; C16.1 C15.1 ; P16.1 R24.1 34.152,43.818 ; 33.782,26.67 v1(35.56,26.67) 35.56,24.003 35.941,23.622 pad.0@38.1,23.622 ; C40.1 34.152,43.818 ; v1(35.052,44.831) 35.165,44.831 34.152,43.818 ; C36.1 41.91,38.735 ; v1(42.545,43.815) 42.545,39.37 41.91,38.735 ; C34.1 C33.1 43.092,37.553 41.91,38.735 ; v1@56.515,62.484 56.603,62.396 C19.1 ; C18.1 C17.1@75.438,93.345 ; v1@69.977,93.408 U4.2 ; v1(74.041,51.308) P4.2
  Bottom Layer w1.2: 8.636,56.388 12.83,56.388 C8.1@13.081,56.137
  Bottom Layer w1.5: P7.3 v1(12.446,20.32) ; R28.1 14.602,43.818 v1(14.605,43.815) P18.1 ; P10.9 P10.10 v1(38.354,9.779) ; R19.1 42.542,43.818 v1(42.545,43.815) P14.1 ; P13.2 P9.2 ; C10.1@53.337,88.138 C10.1 R5.1@55.118,88.141 ; R7.1 v1(79.629,71.247)
  other v1: 43.2,3.8 43.2,5.8 43.2,7.8 43.2,9.8 43.2,11.8 2,51.4 54.8,51.4 57,51.4 59.2,51.4 61.4,51.4 2,53.6 2,55.8 24,55.8 26.2,55.8 28.4,55.8 30.6,55.8 2,58 24,58 26.2,58 28.4,58 94.4,58 2,60.2 8.6,60.2 10.8,60.2 94.4,60.2 2,62.4 46,62.4 52.6,62.4 54.8,62.4 57,62.4 94.4,62.4 77.597,64.389 2,64.6 4.2,64.6 46,64.6 48.2,64.6 52.6,64.6 94.4,64.6 2,66.8 48.2,66.8 50.4,66.8 2,69 4.2,69 10.8,69 70.2,69 94.4,69 2,71.2 4.2,71.2 6.4,71.2 8.6,71.2 10.8,71.2 13,71.2 70.2,71.2 2,73.4 4.2,73.4 6.4,73.4 8.6,73.4 10.8,73.4 13,73.4 70.2,73.4 74.295,73.4 2,75.6 4.2,75.6 8.6,75.6 10.8,75.6 26.2,75.6 28.4,75.6 30.6,75.6 32.8,75.6 35,75.6 37.2,75.6 39.4,75.6 41.6,75.6 43.8,75.6 46,75.6 48.2,75.6 50.4,75.6 2,77.8 26.2,77.8 28.4,77.8 35,77.8 37.2,77.8 39.4,77.8 41.6,77.8 43.8,77.8 46,77.8 48.2,77.8 35,80 37.2,80 39.4,80 41.6,80 43.8,80 46,80 50.4,80 52.6,80 43.8,82.2 46,82.2 30.6,84.4 37.2,84.4 39.4,84.4 46,84.4 30.6,86.6 32.8,86.6 35,86.6 37.2,86.6 39.4,86.6 41.6,86.6 32.8,88.8 35,88.8 37.2,88.8 39.4,88.8 41.6,88.8 32.8,91 35,91 37.2,91 39.4,91 52.6,91 32.8,93.2 35,93.2 37.2,93.2 39.4,93.2 69.977,94.107 35,95.4 37.2,95.4
  other v2: 25.654,26.67
  other v4: 45.148,24.765
HO: R11.1 R12.1 U6.7 | length 11.8
  Bottom Layer w1: R11.1 R12.1 62.269,61.302 64.135,59.436 U6.7@67.691,59.436
LO: R9.1 R29.1 U6.5 | length 15.3
  Bottom Layer w1: U6.5@66.548,56.896 U6.5 68.326,56.896 69.029,57.599 69.029,60.647 69.596,61.214 69.596,65.024 71.183,66.611 73.787,66.611
M\C\L\R\: P7.1 R15.1 U7.1 | length 11.2
  Bottom Layer w0.6: P7.1@9.486,25.4 14.995,25.4 U7.1
  Bottom Layer w1: R15.1 9.486,25.439 P7.1
NetC29_2: C29.2 U7.20 | length 2.6
  Bottom Layer w0.6: C29.2@26.905,11.853 U7.20
NetC35_1: C35.1 INA1.4 R18.1 | length 3.5
  Bottom Layer w1: R18.1 46.355,41.187 C35.1 46.675,40.667 INA1.4
NetC35_2: C35.2 INA1.5 R17.1 | length 3.5
  Bottom Layer w1: INA1.5 48.575,40.667 C35.2 48.895,41.187 R17.1
NetC36_2: C36.2 R16.1 R19.2 U9.3 | length 10.1
  Bottom Layer w0.6: U9.3 35.941,35.56 37.404,37.023 C36.2 ; C36.2@37.465,39.243 R16.1
  Bottom Layer w1: R16.1 R19.2
NetC39_1: C39.1 INA2.4 R23.1 | length 3.7
  Bottom Layer w1: R23.1 18.835,42.418 C39.1 20.386,42.318 INA2.4
NetC39_2: C39.2 INA2.5 R21.1 | length 3.7
  Bottom Layer w1: INA2.5 22.286,42.318 C39.2 23.837,42.418 R21.1
NetC40_2: C40.2 R22.1 R24.2 U9.5 | length 12.5
  Bottom Layer w0.6: U9.5 30.48,34.29 30.861,34.671 R22.1@30.861,41.018
  Bottom Layer w1: R22.1@30.861,41.018 R24.2 C40.2
NetC45_1: C45.1 INA3.4 R27.1 | length 3.5
  Bottom Layer w1: R27.1 3.175,41.187 C45.1 3.495,40.667 INA3.4
NetC45_2: C45.2 INA3.5 R26.1 | length 3.5
  Bottom Layer w1: INA3.5 5.395,40.667 C45.2 5.715,41.187 R26.1
NetC46_2: C46.2 R25.1 R28.2 U10.3 | length 12.4
  Bottom Layer w0.6: 13.37,41.021 13.37,36.541 13.843,36.068 U10.3
  Bottom Layer w1: R25.1 11.811,41.018 12.065,40.764 12.322,41.021 C46.2
NetCon3_1: Con3.1 D4.1 | length 11.5
  Bottom Layer w3: Con3.1 7.865,87.77 D4.1
NetCon3_2: Con3.2 D3.1 | length 10.7
  Bottom Layer w3: Con3.2 9.998,82.69 D3.1
NetD1_2: D1.2 L1.1 U1.2 | length 13.1
  Bottom Layer w1.2: D1.2 42.418,58.952 42.418,53.721 41.734,53.037 U1.2
NetD2_2: D2.2 L2.1 U3.2 | length 28.3
  Bottom Layer w1.4: L2.1@33.528,82.296 41.148,82.296 44.147,85.295 U3.2 44.147,95.201 45.339,96.393 D2.2
NetD5_2: D5.2 Q1.1 R8.1 R11.2 R12.2 | length 14.7
  Bottom Layer w0.7: D5.2 65.564,71.12
  Bottom Layer w1: R12.2 64.77,64.77 65.564,65.564 65.564,68.961 ; R11.2 65.437,66.929 ; R8.1 65.564,68.961 ; Q1.1 65.564,71.12 65.564,68.961
NetD6_2: D6.2 Q2.1 R9.2 R10.2 R29.2 | length 11.4
  Bottom Layer w0.7: R10.2 77.343,69.088 ; D6.2 77.343,71.12
  Bottom Layer w1: 75.692,66.548 76.835,66.548 77.47,67.183 Q2.1
NetD8_1: D8.1 R13.2 | length 4.4
  Top Layer w1: v1(44.704,31.369) D8.1
  Bottom Layer w1: v1(44.704,31.369) R13.2
NetD9_1: D9.1 R14.2 | length 4
  Top Layer w1: D9.1 v1(40.132,31.369)
  Bottom Layer w1: R14.2 v1(40.132,31.369)
NetD10_2: D10.2 R15.2 | length 2.6
  Bottom Layer w1: D10.2 6.731,27.52 R15.2
NetJ1_1: J1.1 P6.3 | length 4.3
  Bottom Layer w1.5: P6.3 J1.1
NetR1_2: R1.2 R2.1 | length 4.1
  Bottom Layer w2.5: R2.1 R1.2
NetR20_1: R20.1 R22.2 | length 3.9
  Bottom Layer w0.5: R20.1 27.686,41.278 R22.2
OUT1_SENSE_NEG: Con4.2 P5.1 R6.2 | length 4
  Bottom Layer w1.5: P5.1 81.163,58.156 R6.2
OUT1_SENSE_POS: C20.1 C21.2 C22.2 C23.2 L3.2 P5.2 R6.1 R7.2 | length 12
  Bottom Layer w1: R7.2 82.42,66.291 ; C21.2 C22.2 C23.2
  Bottom Layer w1.5: P5.2 80.909,63.256 R6.1
PGEC: P7.5 U7.18 | length 24.7
  Bottom Layer w0.6: P7.5 13.589,15.24 16.637,18.288 28.956,18.288 29.445,17.799 U7.18
PGED: P7.4 U7.17 | length 26
  Bottom Layer w0.6: P7.4 14.605,17.78 16.129,19.304 29.591,19.304 30.715,18.18 U7.17
PWR_GOOD: P10.7 P10.8 U7.15 | length 10.6
  Bottom Layer w0.6: U7.15 33.255,10.294 35.814,7.735 P10.8
  Bottom Layer w1.5: P10.7 P10.8
RX: P10.1 P10.2 U7.22 | length 13.6
  Bottom Layer w0.6: U7.22 24.365,12.719 24.765,12.319 24.765,8.382 P10.1
  Bottom Layer w1.5: P10.1 P10.2
RX_DBG: P11.3 U7.24 | length 10.3
  Bottom Layer w0.5: U7.24@21.844,14.431 U7.24 21.825,11.919 21.336,11.43 21.336,6.731 P11.3
TEMP1_IN: P9.3 U7.6 | length 26.9
  Bottom Layer w0.6: U7.6 23.095,21.863 24.384,20.574 45.339,20.574 P9.3
TEMP2_IN: P13.3 U7.7 | length 20.9
  Bottom Layer w0.6: U7.7 24.365,22.244 25.019,21.59 41.021,21.59 41.656,22.225 P13.3
TX: P10.3 P10.4 U7.21 | length 12.9
  Bottom Layer w0.6: U7.21 25.635,10.433 26.416,9.652 28.575,9.652 P10.4
  Bottom Layer w1.5: P10.3 P10.4
TX_DBG: P11.1 U7.23 | length 4.4
  Bottom Layer w0.6: P11.1 23.095,10.268 U7.23 ; P11.1@23.095,10.179 P11.1@23.114,10.16
VB: C26.2 D7.2 U6.8 | length 5.9
  Bottom Layer w0.7: U6.8@67.119,60.96 D7.2@67.119,63.246
  Bottom Layer w1: D7.2 67.564,63.718 C26.2
VREF: U7.28 U8.1 | length 5.2
  Bottom Layer w0.55: U8.1 13.702,13.194 14.958,14.45 U7.28
VS: C26.1 D5.1 L3.1 Q1.3 Q2.2 R8.2 U6.6 | length 31.6
  Bottom Layer w0.7: 60.611,71.12 D5.1
  Bottom Layer w1: Q1.3 60.484,60.801 63.119,58.166 U6.6@67.691,58.166 ; 60.738,68.961 R8.2 ; C26.1 67.564,76.835
pads on no net: H1.A2,5 H1.B2,5 P7.6 P14.2 P16.2 P18.2 U7.12 U7.14 U10.5 U10.6 U10.7

## Polygon pours and split planes (outlines as drawn)
GND on Bottom Layer "Bottom Layer-No Net" (solid, remove dead copper, pour order 17): 51,1 41.275,1 41.275,13.97 51,13.97
GND on Bottom Layer "Bottom Layer-No Net" (solid, remove dead copper, pour order 97): 11.303,70.104 11.303,49 1.038,49 1.016,49.022 1,49.038 1,70.104
GND on Bottom Layer "Bottom Layer-No Net" (solid, remove dead copper, pour order 84): 44.831,60.325 44.831,69.215 59.309,69.215 59.309,60.325
GND on Bottom Layer "Bottom Layer-No Net" (solid, remove dead copper, pour order 90): 49.911,61.468 49.911,49.022 49.933,49 64.643,49 64.643,61.595
OUT1_SENSE_NEG on Bottom Layer "Bottom Layer-No Net" (solid, pour order 78): 81.407,59.436 87.122,59.436 87.122,57.023 87.63,56.515 89.535,56.515 89.535,50.927 81.407,50.927
GND on Bottom Layer "Bottom Layer-No Net" (solid, remove dead copper, pour order 74): 90.297,69.85 90.297,50.927 96.52,50.927 96.52,69.85
OUT1_SENSE_POS on Bottom Layer "Bottom Layer-No Net" (solid, remove dead copper, pour order 71): 96.52,73.279 81.407,73.279 81.407,61.976 84.963,61.976 85.979,60.96 86.233,60.96 89.535,60.96 89.535,69.85 96.52,69.85
GND on Bottom Layer "Bottom Layer-No Net" (solid, remove dead copper, pour order 67): 69.088,75.184 75.184,75.184 75.184,68.072 69.088,68.072
GND on Bottom Layer "Bottom Layer-No Net" (solid, pour order 62): 1,80.137 8.509,80.137 8.89,80.137 14.351,74.676 14.605,74.422 14.605,69.85 1,69.85
GND on Bottom Layer "Bottom Layer-No Net" (solid, remove dead copper, pour order 42): 45.085,94.615 56.515,94.615 56.515,86.868 53.467,86.868 53.467,74.93 24.892,74.93 24.892,83.82 29.337,88.265 31.623,88.265 31.623,93.091 35.941,97.409 45.085,97.409
GND on Top Layer "Bottom Layer-No Net" (solid, remove dead copper, pour order 15): 1,48.768 51,48.768 51,30.48 1,30.48
GND on Top Layer "Bottom Layer-No Net" (solid, remove dead copper, pour order 95): 14.605,64.516 17.399,64.516 17.399,61.595 19.431,61.595 19.431,59.436 19.431,59.182 19.488,59.125 25.319,59.125 25.319,56.307 25.273,56.261 14.351,56.261 14.351,61.722 14.605,61.722
GND on Top Layer "Bottom Layer-No Net" (solid, remove dead copper, pour order 93): 1,74.804 1,49 11.303,49 11.303,69.723 31.623,69.723 31.58,74.677
GND on Top Layer "Bottom Layer-No Net" (solid, remove dead copper, pour order 80): 25.019,74.549 25.019,56.515 20.066,56.515 20.066,49.022 25.019,49 98.978,49 99,49.022 99,74.549
GND on Top Layer "Bottom Layer-No Net" (solid, pour order 50): 1,99 98.94,99 99,99.06 99,74.549 1,74.549
GND on Top Layer "Bottom Layer-No Net" (solid, remove dead copper, pour order 19): 1,30.861 51,30.861 51,1 1,1

## Keep-outs
Keep-Out Layer:
  lines w0.2: 1,1 1,99 99,99 99,1 1,1
  lines w0.254: 11.557,9.017 11.557,4.191 12.446,4.191 16.764,4.191 16.764,12.573 14.478,12.573

## Other copper
Bottom Layer:
  region net GND: 33.274,27.813 33.274,26.162 34.163,26.162 34.163,27.813
  region net GND: 52.832,59.944 53.467,59.944 53.467,49.403 53.721,49.149 53.721,49 44.831,49 44.831,57.785
  region net 5V_SENSE_POS: 19.05,65.532 19.431,65.532 22.098,68.177 27.94,68.177 27.94,63.119 19.05,63.119
  region net GND: 41.021,55.372 31.75,55.372 27.305,59.817 27.305,61.722 22.352,61.722 22.352,54.102 41.021,54.102
  region net NetD1_2: 41.021,53.594 22.225,53.594 22.225,49.53 37.084,49.53 37.084,52.451 41.021,52.451
  region net OUT1_SENSE_NEG: 81.407,56.515 81.407,59.563 87.122,59.563 87.122,56.515
  region net GND: 75.438,62.357 76.073,61.722 76.073,60.071 77.978,60.071 77.978,64.77 75.438,64.77
  region net OUT1_SENSE_POS: 81.407,60.96 81.407,73.279 96.52,73.279 96.52,70.104 89.535,70.104 89.535,69.207 85.979,69.215 85.979,60.96
  region net VS: 60.071,76.073 60.071,73.152 62.738,73.152 64.262,74.676 64.262,75.692 64.643,76.073 96.393,76.073 96.393,88.519 69.723,88.519 69.723,79.248 63.246,79.248
  region net +30V: 48.514,69.85 48.514,74.295 24.13,74.295 24.13,85.217 17.272,85.217 17.272,69.85
  region net +30V: 63.246,80.137 59.309,76.2 59.309,69.85 48.514,69.85 48.514,74.295 54.102,74.295 54.102,80.137 57.912,83.947 63.246,83.947
  region net LO: 73.533,65.532 74.422,65.532 74.422,67.31 73.533,67.31
  region net NetD6_2: 75.184,67.437 75.184,65.786 76.073,65.786 76.073,67.437

## Silkscreen, mask and mechanical layers (free items; w line width, h text height)
Top Overlay:
  lines w0.5: 17.018,33.909 17.018,46.99 ; 35.179,33.909 35.179,46.99
  text "15V" at 62.357,98.044 h1.52 r270
  text "nxt" at 63.5,82.931 h5
  text "DSMPS 2.0" at 62.889,80.137 h4
  text "2017" at 66.899,77.47 h4
  text "CTRL" at 15.24,72.898 h1 r270
  text "S-" at 12.319,69.088 h1
  text "S+" at 17.526,69.088 h1
  text "5V" at 9.906,67.818 h1 r270
  text "GND" at 9.906,64.262 h1 r270
  text "S+" at 81.788,61.468 h1.52
  text "S-" at 81.788,58.801 h1.52
  text "3V3" at 9.906,58.42 h1 r270
  text "3V3" at 57.531,57.531 h1
  text "GND" at 61.468,57.531 h1
  text "5V" at 65.659,57.531 h1
  text "GND" at 9.906,53.086 h1 r270
  text "S+" at 13.97,52.578 h1.52
  text "GND" at 97.282,52.324 h1.52 r90
  text "+Vout" at 84.328,50.927 h1.52 r90
  text "LI" at 70.612,50.038 h1.52
  text "HI" at 75.692,50.038 h1.52
  text "S-" at 13.97,49.784 h1.52
  text "GND" at 15.494,44.958 h1 r270
  text "GND" at 43.561,44.831 h1 r270
  text "S+" at 45.72,44.704 h1.52 r270
  text "S-" at 48.26,44.704 h1.52 r270
  text "S+" at 2.413,44.577 h1.52 r270
  text "S-" at 4.953,44.577 h1.52 r270
  text "S+" at 18.034,44.577 h1.52 r270
  text "Vb" at 8.763,44.489 h1.52 r270
  text "NC" at 11.303,44.489 h1.52 r270
  text "S-" at 23.114,44.45 h1.52 r270
  text "V5" at 26.924,44.45 h1.52 r270
  text "GND" at 32.385,44.45 h1 r270
  text "V3" at 36.703,44.45 h1.52 r270
  text "I/O" at 20.193,42.037 h1
  text "5V" at 46.736,32.766 h1.2
  text "3V3" at 35.433,32.639 h1.2
  text "C3" at 29.972,30.353 h1 r90
  text "MCLR" at 11.303,24.892 h1
  text "3V3" at 35.179,24.13 h1
  text "CB" at 18.288,23.749 h1 r90
  text "VB" at 19.685,23.749 h1 r90
  text "C5" at 21.082,23.749 h1 r90
  text "V5" at 22.479,23.749 h1 r90
  text "V3" at 29.972,23.622 h1 r90
  text "3V3" at 11.303,22.352 h1
  text "T2" at 48.768,21.717 h1
  text "GND" at 4.953,19.812 h1
  text "T1" at 42.672,19.431 h1
  text "GND" at 37.211,18.796 h1
  text "nxt" at 18.034,18.415 h5
  text "PGED" at 4.064,17.399 h1
  text "5V" at 50.8,16.764 h1 r90
  text "PGEC" at 4.064,14.859 h1
  text "GND" at 36.322,12.7 h1.52
  text "L" at 17.145,11.43 h1
  text "3V3" at 42.545,10.414 h1 r90
  text "TX" at 24.765,9.652 h1
  text "GND" at 43.307,6.477 h1 r90
  text "5V" at 42.672,3.175 h1 r90
  text "H" at 17.145,2.921 h1
  text "RX" at 24.384,2.921 h1
Bottom Overlay:
  text "3V3" at 38.862,27.813 h1
  text "GND" at 36.703,21.082 h1
  text "5V" at 49.276,12.7 h1 r90

## Dimensions
1,1 to 99,1 on Mechanical 1
1,1 to 1,99 on Mechanical 1

## Text inside footprints (layer, text, board x,y; h text height)
C5: Top Overlay "+" at 55.372,75.565 h1.5 r270
C6: Top Overlay "+" at 36.832,67.068 h1.5
C13: Top Overlay "+" at 51.193,86.231 h1.5 r270
C14: Top Overlay "+" at 23.495,97.155 h1.52 r90
C20: Top Overlay "+" at 83.695,66.687 h1.5
D1: Top Overlay "K" at 36.83,64.008 h1.52
D3: Top Overlay "K" at 11.811,83.439 h1.52
D4: Top Overlay "K" at 11.811,87.63 h1.52
H1: Mechanical 2 "2,5" at 55.245,89.281 h1.27; Mechanical 2 "2,5" at 81.28,89.281 h1.27
P10: Top Overlay "10" at 39.878,6.985 h1.27; Top Overlay "9" at 39.878,4.445 h1.27; Top Overlay "1" at 28.067,1.905 h1.27; Top Overlay "2" at 25.654,6.985 h1.27
U4: Top Overlay "1" at 74.549,98.298 h1.5 r180; Top Overlay "2" at 69.342,98.552 h1.5 r270; Top Overlay "3" at 66.04,98.298 h1.5 r180